# Altium PCB 2VJAWS_RFr60B.PcbDoc
Units mil, origin at the board's own origin, x right, y up, seen from the top; angles counter-clockwise.
Board outline 990 x 945.05 mil, 2 copper layers (Top Layer, Bottom Layer), stack 40.756 mil thick; 2 components, 2 nets, 19 pads, 90 vias.
Unrouted connection lines stored in the file: 1.
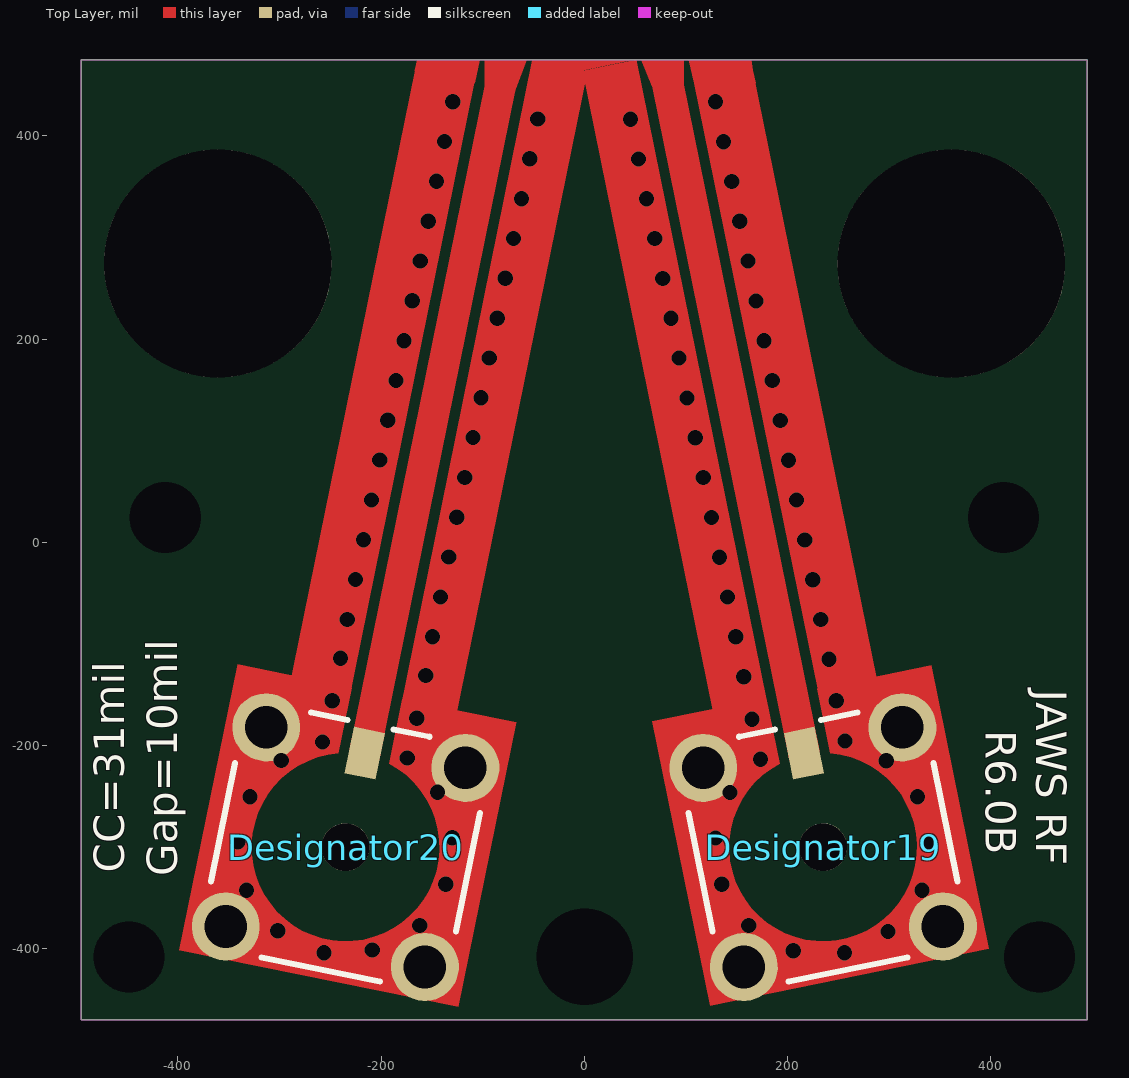
[diagram p0: Top Layer view]
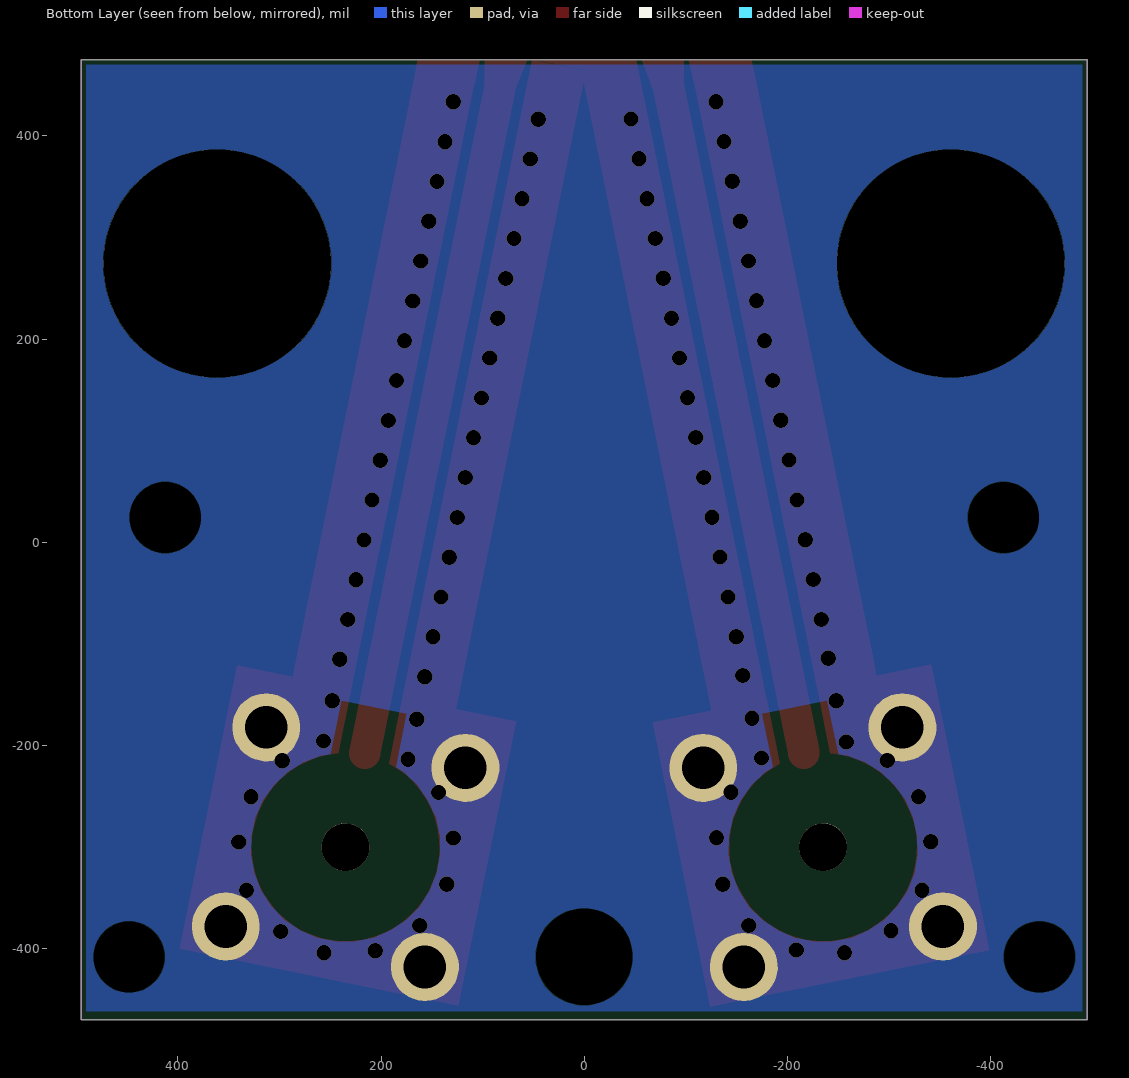
[diagram p1: Bottom Layer view, seen from below]

## Layer stack, top to bottom
Top Solder: solder mask 1, SM-001, Dk 4
Top Layer: signal copper 1.378
Core1: dielectric 10, RO4350B, Dk 3.48
Dielectric 1: prepreg 7, PR7628, Dk 4.24
Dielectric 2: prepreg 4, PR2116, Dk 4.17
Dielectric 3: prepreg 7, PR7628, Dk 4.24
Core2: dielectric 10, RO-4350B, Dk 3.48
Bottom Layer: signal copper 1.378
Bottom Solder: solder mask 1, SM-001, Dk 4

## Board outline
-495,-470 -495,475.05 495,475.05 495,-470

## Design rules (kind name [scope] priority, off if disabled: settings)
BoardOutlineClearance [All] p1: gap=10 ignorepadtopadclearanceinfootprint=FALSE except(0: Arc-SplitContinuation Track-OutlineEdge Track-CutoutEdge Track-SplitContinuation SMDPad-SplitContinuation THPad-SplitContinuation Via-SplitContinuation Fill-OutlineEdge Fill-CutoutEdge Fill-SplitContinuation Poly-OutlineEdge Poly-CutoutEdge Poly-SplitContinuation Region-OutlineEdge Region-CutoutEdge Region-SplitContinuation Text-SplitContinuation)
Clearance [All] p1: gap=10 ignorepadtopadclearanceinfootprint=FALSE except(0: Arc-Poly Arc-Hole Track-Poly Track-Hole SMDPad-Hole THPad-Hole Via-Poly Via-Hole Fill-Poly Fill-Hole Poly-Poly Poly-Region Poly-Hole Region-Hole Text-Hole; 9: Arc-Track Track-Track Track-SMDPad Track-THPad Track-Via Track-Fill Track-Region Track-Text SMDPad-Fill SMDPad-Poly; 30: THPad-Poly)
HoleSize [All] p1: absolutevalues=TRUE maxlimit=150 minlimit=1 maxpercent=80.000 minpercent=20.000
PolygonConnect [All] p1: connectstyle=Direct reliefconductorwidth=10 reliefentries=4 polygonreliefangle="90 Angle" airgapwidth=10
RoutingVias [All] p1: holewidth=28 width=50 viastyle="Through Hole" minholewidth=5 minwidth=10 maxholewidth=28 maxwidth=50
SolderMaskExpansion [All] p1: expansion=4 istentingtop=FALSE
Width [All] p1: maxlimit=50 minlimit=10 preferedwidth=10 bottomlayer_maxwidth=10 minimp=50.000000 maximp=50.000000 favimp=50.000000
29 further rules are at their usual default settings.

## Components (designator, comment, footprint, x,y, rotation, side; value= is the part's Value field where it differs from the comment)
Designator19 "Comment" CONN_73415-3310_MOL 235,-300 r191.5 top
Designator20 "Comment" CONN_73415-3310_MOL -235,-300 r168.5 top

## Footprints (in the part's own frame and the unit in brackets; to place one, negate y for a bottom-side part, rotate by r counter-clockwise, add the part's x,y. Pads: shape width x height; smd on the part's side, far side on the other; paste and mask are expansions set on the pad)
CONN_73415-3310_MOL [mil]
  rect 31x47 smd paste-99999 mask+0: 1(0,-94.5)
  round 67 hole 42 paste-99999 mask-33.5: 2(100,-100) 3(-100,-100) 4(100,100) 5(-100,100)
  round 47 hole 47 unplated: ""(0,0)
  silkscreen extent -123,-123 123,123, body extent -118,-137 118,118, height 161

## Free pads (board coordinates)
  round 60 hole 70 unplated: ""(-448,-408) ""(-412.5,24.5) ""(412.5,24.5) ""(448,-408)
  round 224 hole 224 unplated: ""(-360.71,274.47) ""(361.29,274.47)
  round 60 hole 95 unplated: ""(0.29,-408.03)

## Via types
v1: diameter 15, hole 15, Top Layer to Bottom Layer, 90 vias

## Nets (pads, with @x,y where several pads share a name; then routed paths per layer and width w, separated by ;. In a path a pad name is that pad's centre, name@x,y a point inside that pad or via, vN(x,y) a via of type N, cw(c..) or ccw(c..) an arc to the next point about the centre after c; other vN are vias at no path point)
CC: Designator19.1 Designator20.1 | length 1340
  Top Layer w31: Designator20.1 -82.75,448.34 ; 82.41,450 Designator19.1
GND: Designator19.2 Designator19.3 Designator19.4 Designator19.5 Designator20.2 Designator20.3 Designator20.4 Designator20.5
  other v1: -256.13,-403.87 256.13,-403.87 205.72,-401.88 -208.66,-401.28 298.82,-382.94 -301.76,-382.34 -161.91,-377.12 161.91,-377.12 -332.41,-342.43 332.41,-342.43 135.3,-336.61 -136.28,-336.41 -341.08,-294.75 340.1,-294.94 -130.05,-290.74 129.07,-290.94 -328.97,-250.27 327.99,-250.47 -144.41,-245.98 143.43,-246.18 -298.26,-214.68 297.28,-214.87 173.52,-213.52 -174.31,-212.34 -257.8,-196.37 256.62,-195.59 165,-174 -165,-173 -248,-156 248,-156 156.98,-132.19 -156,-131 240.76,-115.14 -240,-114 -149.49,-92.89 149,-92.99 -233.28,-75.84 232.79,-75.94 -141.52,-53.69 141.03,-53.79 -225.3,-36.65 224.81,-36.75 133.05,-14.6 -133.54,-14.5 -217.33,2.55 216.84,2.45 -125.57,24.7 125.08,24.6 -209.35,41.75 208.86,41.65 -117.59,63.9 117.1,63.8 -201.38,80.94 200.89,80.84 -109.62,103.1 109.13,103 -193.4,120.14 192.91,120.04 -101.64,142.29 101.15,142.19 -185.43,159.34 184.94,159.24 93.18,181.39 -93.67,181.49 176.96,198.44 -177.45,198.54 -85.69,220.69 85.2,220.59 -169.48,237.73 168.99,237.63 -77.72,259.88 77.23,259.78 -161.5,276.93 161.01,276.83 -69.75,299.08 69.26,298.98 -153.53,316.13 153.04,316.03 -61.77,338.28 61.28,338.18 -145.55,355.32 145.06,355.22 53.31,377.37 -53.8,377.47 137.09,394.42 -137.58,394.52 -45.82,416.67 45.33,416.57 -129.6,433.72 129.11,433.62
pads on no net: Designator19. Designator20.

## Polygon pours and split planes (outlines as drawn)
GND on Bottom Layer "NONET_L-01_P-001" (solid, pour order 8): -490,470 490,470 490,-461.5 -490,-461.5

## Keep-outs
Keep-Out Layer:
  the board outline again, w1

## Other copper
Top Layer:
  region net GND: -291.6,-148.68 -232.67,-160.67 -107.85,452.88 -166.77,464.87
  region net GND: 229.8,-146.55 287.98,-134.71 166.18,463.95 108,452.12
  region net GND: 126.75,-167.34 179.79,-156.55 51.23,475.35 -1.81,464.56
  region net GND: -181.7,-165.93 -127.29,-177 3.02,463.5 -51.39,474.57
  region net GND: 398.23,-400.08 123.85,-455.9 66.91,-176.02 179.11,-153.2 192.24,-217.82 ccw(c235,-300) 242.25,-207.65 229.29,-144.01 341.49,-121.18
  region net GND: -124.09,-457.06 -398.46,-401.24 -341.29,-120.2 -229.09,-143.03 -242.25,-207.65 ccw(c-235,-300) -192.24,-217.82 -179.31,-154.18 -67.11,-177
  region net GND: -51.39,474.57 -50.91,475.05 51.23,475.35 -3.16,464.29
  region net GND: 108,452 168.5,452 166,464.5 164.08,475.05 103,475.05
  region net CC: 67,448.5 98,451 98,475.05 56,475.05
  region net CC: -98,451 -98,475 -56.5,475 -67.5,446.5
  region net GND: -166.96,464.1 -164.25,475 -103,475 -108.03,452.11
Bottom Layer:
  pour cut-out: -249.7,-208.54 ccw(c-235,-300) -185.78,-221.52 -185.81,-221.23 -175.14,-168.8 -238.84,-155.84
  pour cut-out: 185.73,-221.55 ccw(c235,-300) 249.64,-208.53 249.5,-208.27 238.84,-155.84 175.14,-168.8

## Silkscreen, mask and mechanical layers (free items; w line width, h text height)
Top Overlay:
  text "JAWS RF" at 445,-145 h30 r270
  text "R6.0B" at 395,-185 h30 r270
  text "CC=31mil" at -452.65,-325.18 h30 r90
  text "Gap=10mil" at -400.65,-328.68 h30 r90
Top Paste:
  region: 187.59,-443.24 184.45,-426.73 ccw(c155.86,-417.64) 130.57,-401.51 112.97,-404.94 112.48,-405.04 80.98,-250.21 99.13,-246.46 ccw(c115.99,-221.65) 90.7,-205.52 73.1,-208.95 66.46,-176.24 66.33,-175.76 178.53,-152.93 191.66,-217.56 191.71,-217.39 ccw(c235,-300) 242.08,-207 228.7,-143.74 340.91,-120.92 347.58,-153.62 330.04,-157.34 ccw(c313.06,-182.07) 338.27,-198.32 356.44,-194.67 387.94,-349.5 387.45,-349.6 369.91,-353.32 ccw(c352.93,-378.06) 330.17,-397.6 333.72,-414.02 333.71,-414.02
  region: -334.61,-413.33 -331.05,-396.91 ccw(c-353.81,-377.37) -370.79,-352.63 -388.33,-348.91 -388.82,-348.81 -357.32,-193.99 -339.16,-197.63 ccw(c-313.94,-181.38) -330.92,-156.65 -348.46,-152.93 -341.79,-120.23 -341.72,-119.73 -229.52,-142.56 -242.68,-207.18 -242.58,-207.04 ccw(c-235,-300) -192.15,-217.16 -179.74,-153.71 -67.54,-176.53 -74.18,-209.24 -91.78,-205.81 ccw(c-117.07,-221.94) -100.2,-246.75 -82.06,-250.5 -113.56,-405.33 -114.05,-405.23 -131.65,-401.8 ccw(c-156.94,-417.93) -185.53,-427.02 -188.67,-443.53 -188.68,-443.53
Top Solder:
  region: -196.88,-190.4 -188.81,-150.71 -219.19,-144.53 -227.26,-184.22
  region: -121.85,-154.64 9.6,491.42 -155.31,524.97 -286.75,-121.09
  region: 227.26,-184.22 219.19,-144.53 188.81,-150.71 196.88,-190.4
  region: 285.17,-121.41 153.77,524.43 -7.05,491.71 124.35,-154.13
  region: -124.07,-456.96 -398.45,-401.14 -341.29,-120.2 -229.09,-143.03 -242.25,-207.65 ccw(c-235,-300) -192.24,-217.82 -179.31,-154.18 -67.11,-177
  region: 398.05,-399.21 123.67,-455.03 66.91,-176.02 179.11,-153.2 192.24,-217.82 ccw(c235,-300) 242.25,-207.65 229.29,-144.01 341.49,-121.18
Bottom Solder:
  rectangle: -490,-465 490,487
Mechanical 1:
  text "2 Layers / RO4350b 20 mil stack up / Finished thickness  0.508 mm / 1oz copper outer layer / Soldermask top: green / Soldermask bottom: none / Silkscreen: white / Finish: Immersion Au" at 854.5,1.5 h60
  text "Contact Info: / Anna Fox / 303-497-5984 / foxa@nist.gov" at 892.75,-605.75 h60
Mechanical 2:
  text "A)  using 10/31/10 mil gcpw (using Rogers 4350B 0.508mm, like in J7/J8 of “Rogers 4350b 20 mil test board, rev 3.0”) / B)  Launch to smp use 47mil hole (like in J7/J8 of “Rogers 4350b 20 mil test board, rev 3.0”) / C)  Keep wide pin launch (like in J7/J8 of “Rogers 4350b 20 mil test board, rev 3.0”) / then remove more grnd around the pin on the back of the PCB (see picture).  This does assume that the hole in the copper package will be larger than the removed grnd plane / D)  If we are going to be doing assembly, then reduce exposed area of top paste (maybe even if other people are doing assembly); with the current top-paste mask, I am getting too much solder paste  / E)  reduce size of the smp mounting holes slightly / F) backside fully covered in copper ground plane with no mask?" at 765.25,1344.25 h60
Mechanical 3:
  lines w1: -283,-203 -283,458 ; -198,-202 -198,457 ; 197,-203 197,458 ; 282,-202 282,457
Mechanical 4:
  circle w1: c412.75,1774.5 r37.5
  circle w1: c400.25,774.5 r37.5
  circle w1: c361.25,1274.5 r110.5
  circle w1: c412.75,564.5 r37.5
  circle w1: c-360.75,1274.5 r110.5
  circle w1: c-399.75,774.5 r37.5
  circle w1: c-412.25,564.5 r37.5
  circle w1: c-412.25,1774.5 r37.5
  lines w1: -196.75,1079 197.25,1079 ; -204.75,479 -204.74,479.01 ; -204.75,479.02 -204.75,1039 cw(c-204.75,1059) -204.75,1079 205.25,1079 cw(c205.25,1059) 205.25,1039 205.25,479 495.25,479 495.25,2024.5 -494.75,2024.5 -494.75,479 -204.75,479 ; -368.75,1455.75 368.25,1455.75 368.25,1711.75 -368.75,1712.75 -368.75,1455.75 ; -368.75,1711.5 368.75,1711.5 368.75,1453 -368.25,1453 -368.75,1711.5 ; 275.25,479 275.26,479.01
  lines w10: -449.75,-95.25 450.25,-95.25 450.25,1768.75 -449.75,1768.75 -449.75,-95.25
Mechanical 5:
  circle w1: c361,274.82 r112
  circle w1: c-361,274.82 r112
  circle w1: c361.29,1274.47 r64.25
  circle w1: c-360.71,1274.47 r64.25
  circle w1: c-360.71,274.47 r64.25
  circle w1: c361.29,274.47 r64.25
  circle w1: c400.29,774.47 r23.45
  circle w1: c-399.71,774.47 r23.45
  circle w1: c448,-408.03 r50
  circle w1: c-448,-408.03 r50
  circle w1: c412.79,24.47 r23.45
  circle w1: c-412.21,24.47 r23.45
  circle w1: c412.79,564.47 r23.45
  circle w1: c-412.21,564.47 r23.45
  circle w1: c330.29,774.47 r23.45
  circle w1: c-329.71,774.47 r23.45
  circle w1: c412.79,1774.47 r23.45
  circle w1: c-412.21,1774.47 r23.45
  circle w1: c0.29,1101.97 r31.25
  circle w1: c229.29,583.1 r31.25
  circle w1: c-228.71,583.1 r31.25
  circle w1: c0.14,-407.8 r35
  circle w1: c0.14,-407.8 r83.5
  lines w1: -494.71,-475.53 495.29,-475.53 ; -364.5,1274.5 -360.75,1274.5 ; -265.21,-600.53 -265.21,-475.53 ; -226.21,-600.53 -226.21,-475.53 ; -152,475 -97,475 ; -78.5,475 -78.5,495 ; -73.49,-475.53 ccw(c0.29,-408.03) 74.07,-475.53 ; -60,475 -5,475 ; 0,0 0.29,478.97 ; 5,475 60,475 ; 78.5,475 78.5,495.5 ; 97,475 152,475 ; 226.79,-600.53 226.79,-475.53 ; 265.79,-600.53 265.79,-475.53 ; 328,475 383,475 ; -360.75,1274.5 -356.75,1274.5 -360.75,1274.5 ; -360.75,1274.5 -360.75,1269.75 -360.75,1279.25 -360.75,1274.5 ; -494.71,-600.53 495.29,-600.53 495.29,2024.47 -494.71,2024.47 -494.71,-600.53 ; -196.71,478.97 197.29,478.97 197.29,1069.97 -196.71,1069.97 -196.71,478.97
Mechanical 6:
  lines w1: 4.9,462.31 7.88,462.64

## Dimensions
495.29,-600.53 to 495,475.05 on Mechanical 2
-494.71,-600.53 to 495.29,-600.53 on Mechanical 2